# EAGLE board shifter tcm (EAGLE 9.1.0)
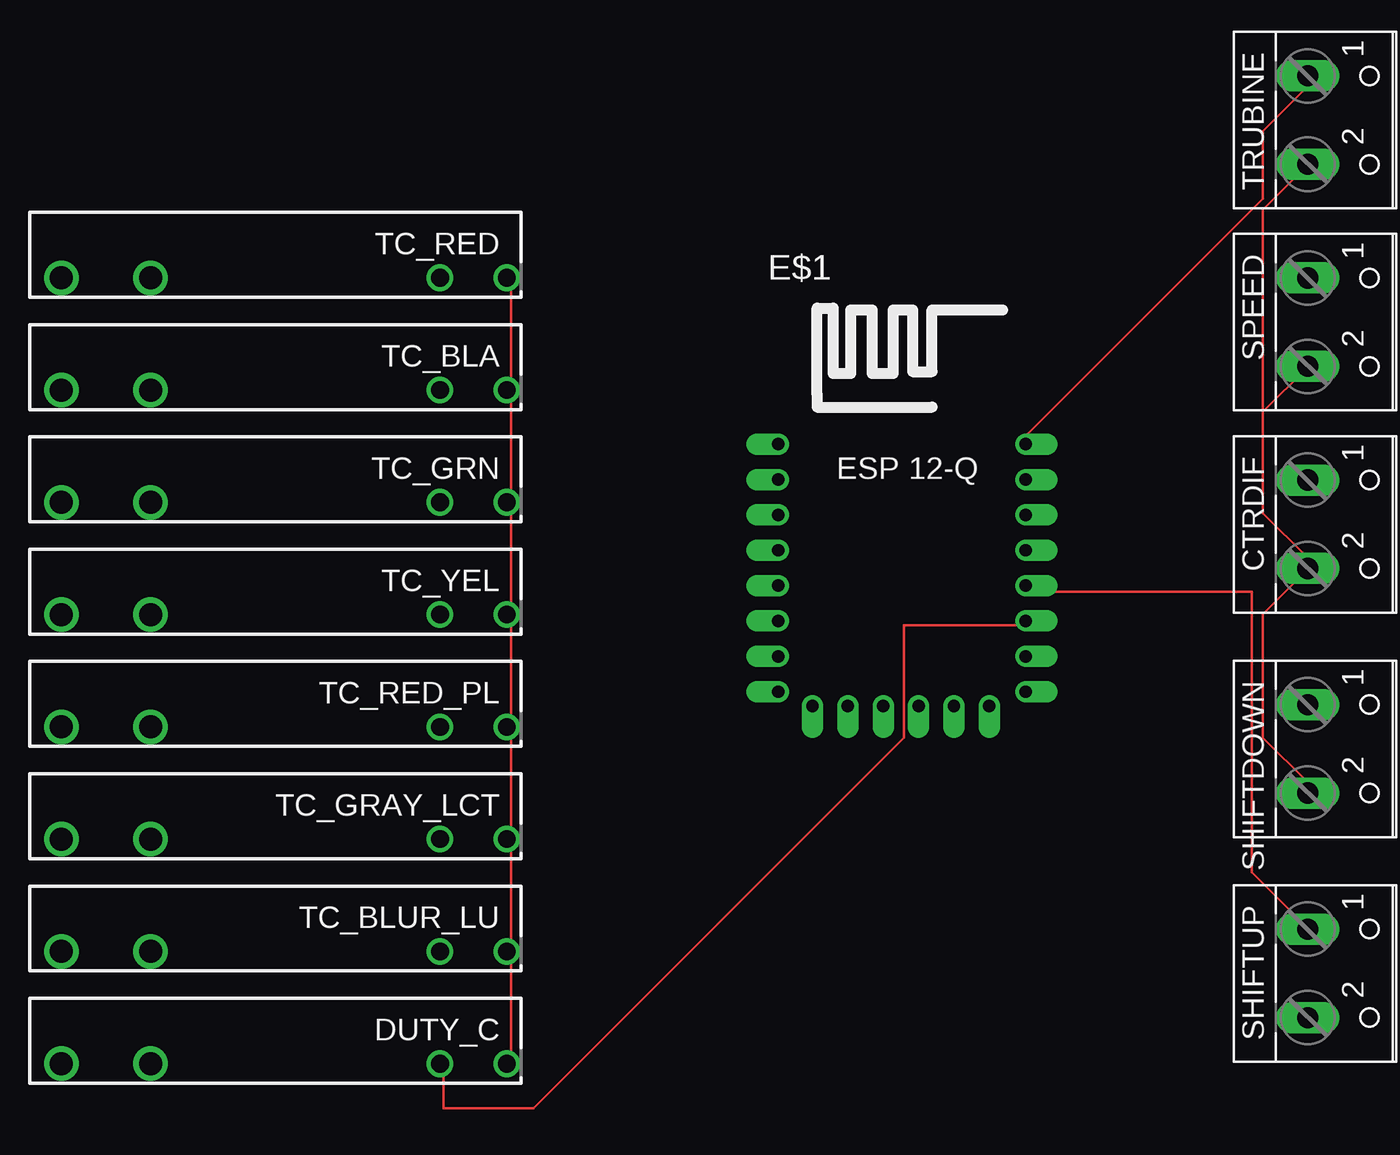
[diagram p0: board, top side]
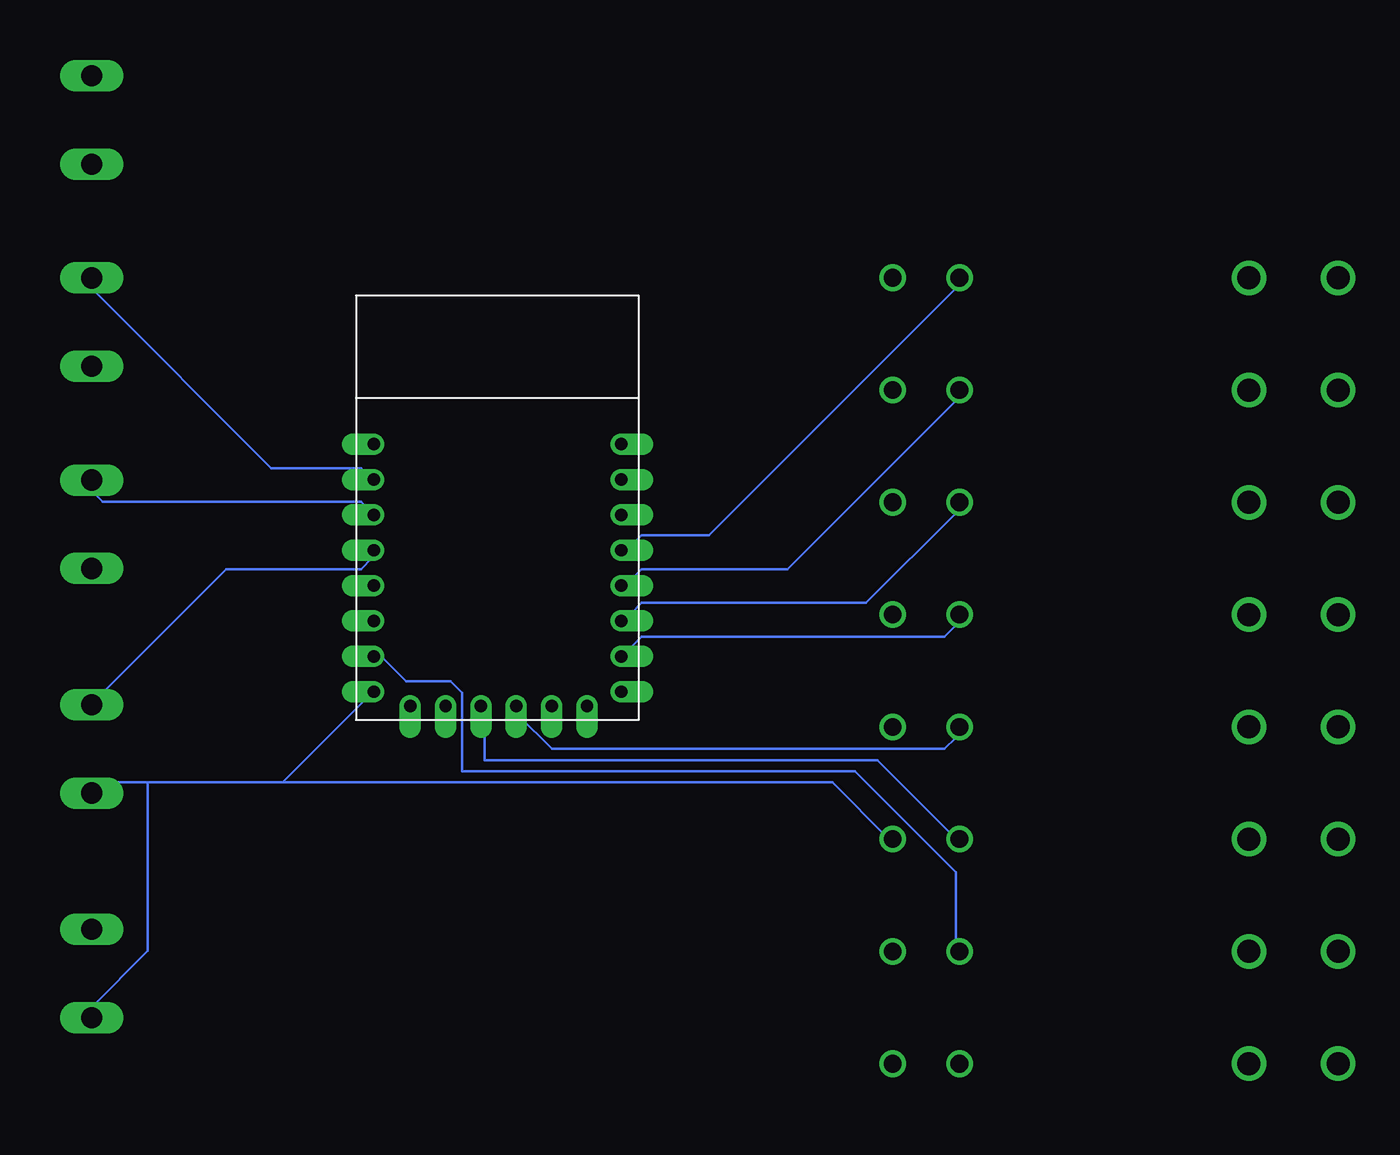
[diagram p1: board, bottom side, seen from below]

No outline drawn. Coordinates in mm, seen from the top.
Copper layers (1*16): Top 0.035mm / dielectric 1.5mm / Bottom 0.035mm
Design rules "default": minimum track width 6mil, minimum drill 0.35mm, track to track 6mil, track to pad 6mil, pad to pad 6mil, via to via 6mil, smd to smd 6mil, copper to edge 40mil, drill to drill 6mil, minimum pad ring 10mil, minimum via ring 8mil, stop-mask expansion 4mil, vias tented up to drill 0mil, thermal gap 10mil

## Footprints (pad centres in the part's own frame; a part is rotated, then mirrored left to right if it is on the bottom)
W237-102 = drill 1.194 long: 1 -2.5,-1.27; 2 2.5,-1.27
PE-FORM-A = drill 1: 1 -13.1,1.3; 2 -9.32,1.3 | drill 1.3: COM 7.06,1.3; NO 12.1,1.3
ESP12Q = drill 0.7 offset: ADC -7.1,3.8; CH_PD -7.1,1.8; CS0 -5.165,-9.005; GND 6.9,-8.2; GPIO0 6.9,-2.2; GPIO2 6.9,-4.2; GPIO4 6.9,1.8; GPIO5 6.9,-0.2; GPIO9 -1.165,-9.005; GPIO10 0.835,-9.005; GPIO12 -7.1,-4.2; GPIO13 -7.1,-6.2; GPIO14 -7.1,-2.2; GPIO15 6.9,-6.2; GPIO16 -7.1,-0.2; MISO -3.165,-9.005; MOSI 2.835,-9.005; RESET -7.1,5.8; RX 6.9,3.8; SCLK 4.835,-9.005; TX 6.9,5.8; VCC -7.1,-8.2

## Placement (x,y rotation side)
CTRDIF  [W237-102]  102.87,45.72 270 top
DUTY_C  [PE-FORM-A]  43.18,16.51 180 top
E$1  [ESP12Q]  78.74,44.45 0 top
SHIFTDOWN  [W237-102]  102.87,33.02 270 top
SHIFTUP  [W237-102]  102.87,20.32 270 top
SPEED  [W237-102]  102.87,57.15 270 top
TC_BLA  [PE-FORM-A]  43.18,54.61 180 top
TC_BLUR_LU  [PE-FORM-A]  43.18,22.86 180 top
TC_GRAY_LCT  [PE-FORM-A]  43.18,29.21 180 top
TC_GRN  [PE-FORM-A]  43.18,48.26 180 top
TC_RED  [PE-FORM-A]  43.18,60.96 180 top
TC_RED_PL  [PE-FORM-A]  43.18,35.56 180 top
TC_YEL  [PE-FORM-A]  43.18,41.91 180 top
TRUBINE  [W237-102]  102.87,68.58 270 top

## Library data of the parts
CTRDIF SHIFTDOWN SHIFTUP SPEED TRUBINE = con-wago-500
DUTY_C TC_BLA TC_BLUR_LU TC_GRAY_LCT TC_GRN TC_RED TC_RED_PL TC_YEL = relay
E$1 = esp826612q

## Nets
S$1: DUTY_C.2 E$1.GPIO2
S$2: E$1.GPIO16 TC_RED.2
S$3: E$1.GPIO14 TC_BLA.2
S$4: E$1.GPIO12 TC_GRN.2
S$5: E$1.GPIO13 TC_YEL.2
S$6: E$1.GPIO9 TC_RED_PL.2
S$7: E$1.GPIO10 TC_GRAY_LCT.2
S$8: E$1.GPIO15 TC_BLUR_LU.2
S$9: E$1.GPIO0 SHIFTUP.1
S$10: E$1.GPIO5 SHIFTDOWN.1
S$11: CTRDIF.1 E$1.GPIO4
S$12: E$1.RX SPEED.1
S$13: E$1.TX TRUBINE.1
S$14: CTRDIF.2 DUTY_C.1 E$1.GND SHIFTDOWN.2 SHIFTUP.2 SPEED.2 TC_BLA.1 TC_BLUR_LU.1 TC_GRAY_LCT.1 TC_GRN.1 TC_RED.1 TC_RED_PL.1 TC_YEL.1 TRUBINE.2

## Tracks (layer width: path | path; a pad name or v marks a point on that pad's centre or on a via)
S$1
  Top 0.152: E$1.GPIO2 85.09,40.01 78.74,40.01 78.74,33.66 57.78,12.7 52.7,12.7 52.7,14.61 DUTY_C.2
S$2
  Bottom 0.152: E$1.GPIO16 71.12,44.45 70.48,45.09 66.67,45.09 52.7,59.05 TC_RED.2
S$3
  Bottom 0.152: E$1.GPIO14 71.12,42.55 70.48,43.18 62.23,43.18 52.7,52.7 TC_BLA.2
S$4
  Bottom 0.152: E$1.GPIO12 71.12,40.64 70.48,41.27 57.78,41.27 52.7,46.35 TC_GRN.2
S$5
  Bottom 0.152: E$1.GPIO13 71.12,38.73 70.48,39.37 53.34,39.37 52.7,40.01 TC_YEL.2
S$6
  Bottom 0.152: E$1.GPIO9 77.47,34.92 75.56,33.02 53.34,33.02 52.7,33.66 TC_RED_PL.2
S$7
  Bottom 0.152: E$1.GPIO10 79.38,34.92 79.38,32.38 57.15,32.38 52.7,27.94 TC_GRAY_LCT.2
S$8
  Bottom 0.152: E$1.GPIO15 85.09,38.1 83.82,36.83 81.28,36.83 80.64,36.2 80.64,31.75 58.42,31.75 52.7,26.04 52.7,21.59 TC_BLUR_LU.2
S$9
  Top 0.152: E$1.GPIO0 85.72,41.91 98.42,41.91 98.42,26.04 101.6,22.86 SHIFTUP.1
S$10
  Bottom 0.152: E$1.GPIO5 85.72,43.81 86.36,43.18 93.98,43.18 101.6,35.56 SHIFTDOWN.1
S$11
  Bottom 0.152: E$1.GPIO4 85.72,46.35 86.36,46.99 100.97,46.99 101.6,47.62 CTRDIF.1
S$12
  Bottom 0.152: E$1.RX 85.72,48.26 86.36,48.9 91.44,48.9 101.6,59.05 SPEED.1
S$13
  Top 0.152: E$1.TX 85.72,50.8 99.06,64.14 99.06,67.94 101.6,70.48 TRUBINE.1
S$14
  Top 0.152: TC_RED.1 56.52,59.05 56.52,53.34 TC_BLA.1 56.52,52.7 56.52,46.99 TC_GRN.1 56.52,46.35 56.52,40.64 TC_YEL.1 56.52,40.01 56.52,34.29 TC_RED_PL.1 56.52,33.66 56.52,27.94 TC_GRAY_LCT.1 56.52,27.3 56.52,21.59 TC_BLUR_LU.1 56.52,20.95 56.52,15.24 DUTY_C.1 | 99.06,52.07 99.06,46.35 101.6,43.81 CTRDIF.2 101.6,43.18 99.06,40.64 99.06,33.66 101.6,31.11 SHIFTDOWN.2 | 99.06,52.07 101.6,54.61 SPEED.2 | 99.06,52.07 99.06,63.5 101.6,66.04 TRUBINE.2
  Bottom 0.152: 90.81,31.11 85.72,36.2 E$1.GND | 98.42,31.11 101.6,31.11 SHIFTDOWN.2 | 98.42,31.11 90.81,31.11 | 98.42,31.11 98.42,21.59 101.6,18.41 SHIFTUP.2 | 90.81,31.11 59.69,31.11 56.52,27.94 TC_GRAY_LCT.1